# EAGLE board Crystal Cmoy Sch EaglePCB 3 (EAGLE 7.5.0)
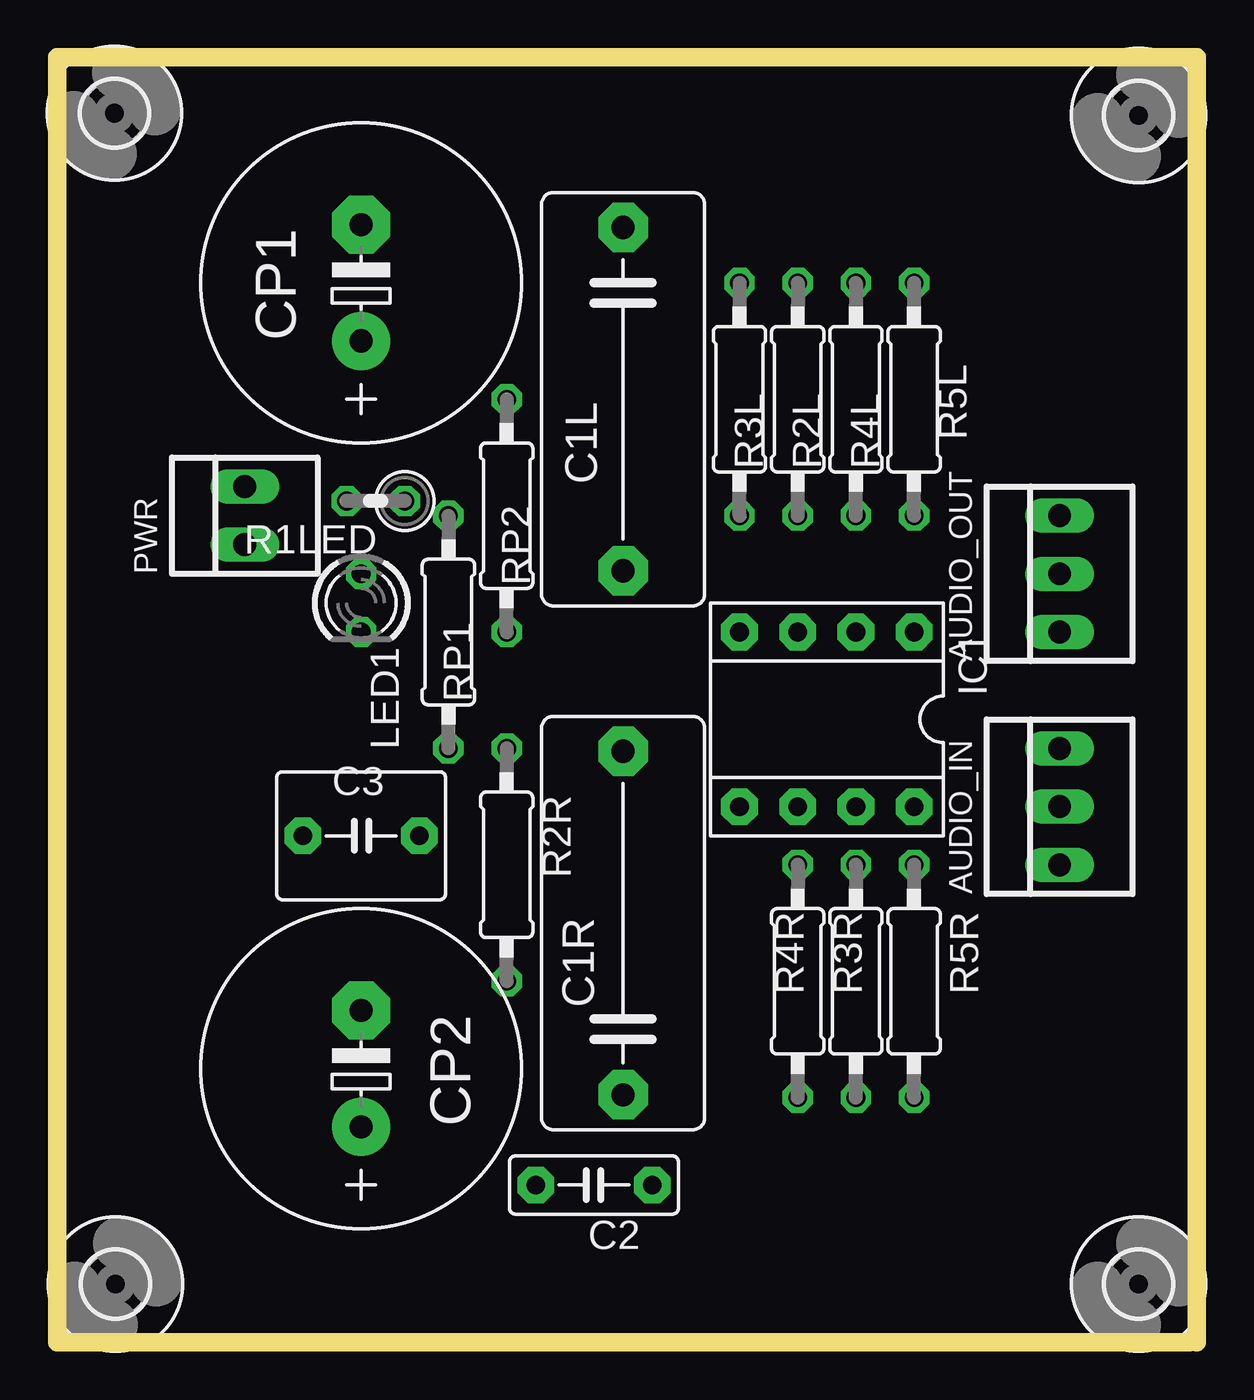
[diagram p0: board, top side]
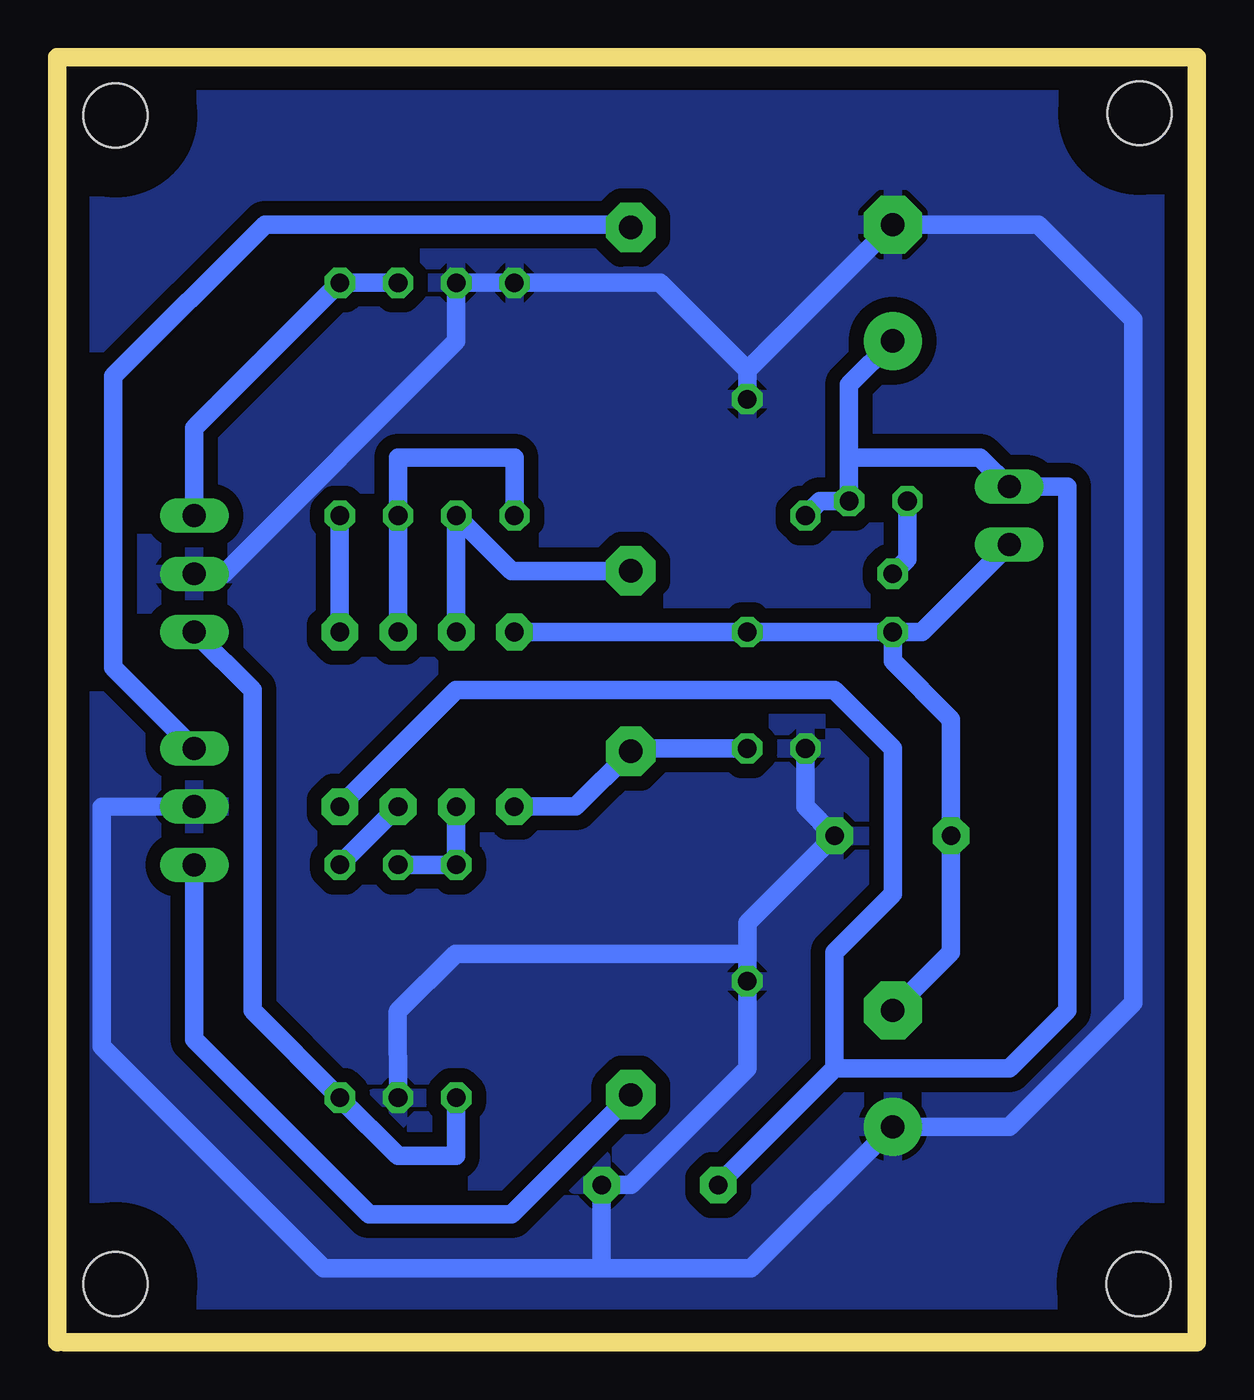
[diagram p1: board, bottom side, seen from below]

Size 49.72 x 56.07 mm. Coordinates in mm from the lower left corner, seen from the top.
Outline: 49.39,0 0,0 0,56.07 49.72,56.07 49.72,0
Copper layers (1*16): Top 0.035mm / dielectric 1.5mm / Bottom 0.035mm
Design rules "default *": minimum track width 10mil, minimum drill 24mil, track to track 8mil, track to pad 60mil, pad to pad 8mil, via to via 8mil, smd to smd 8mil, copper to edge 40mil, drill to drill 8mil, minimum pad ring 10mil, minimum via ring 8mil, stop-mask expansion 4mil, vias tented up to drill 0mil, thermal gap 10mil
Net classes: 0 default: width 1.397 mm, clearance 0.635 mm

## Footprints (pad centres in the part's own frame; a part is rotated, then mirrored left to right if it is on the bottom)
22-23-2031 = drill 1 long: 1 -2.54,0; 2 0,0; 3 2.54,0
C15B7 = drill 1.016 pad 2.159 octagon: 1 -7.493,0; 2 7.493,0
C5B2.5 = drill 0.813 pad 1.6 octagon: 1 -2.54,0; 2 2.54,0
C5B5.5 = drill 0.813 pad 1.6 octagon: 1 -2.54,0; 2 2.54,0
E5-13 = drill 1.016 pad 2.54: + -2.54,0 | drill 1.016 pad 2.54 octagon: - 2.54,0
DIL08 = drill 0.813 pad 1.6 octagon: 1 -3.81,-3.81; 2 -1.27,-3.81; 3 1.27,-3.81; 4 3.81,-3.81; 5 3.81,3.81; 6 1.27,3.81; 7 -1.27,3.81; 8 -3.81,3.81
LED3MM = drill 0.813 octagon: A -1.27,0; K 1.27,0
22-23-2021 = drill 1 long: 1 -1.27,0; 2 1.27,0
0207/2V = drill 0.813 octagon: 1 -1.27,0; 2 1.27,0
0207/10 = drill 0.813 octagon: 1 -5.08,0; 2 5.08,0
2,8 = hole 2.8: 0,0

## Placement (x,y rotation side)
AUDIO_IN  22-23-2031  [22-23-2031]  43.74,23.37 90 top
AUDIO_OUT  22-23-2031  [22-23-2031]  43.74,33.53 90 top
C1L  0.68uF  [C15B7]  24.69,41.15 270 top
C1R  0.68uf  [C15B7]  24.69,18.29 90 top
C2  0.1uF  [C5B2.5]  23.42,6.86 180 top
C3  0.1uF  [C5B5.5]  13.26,22.1 0 top
CP1  470uf  [E5-13]  13.26,46.23 90 top
CP2  470uf  [E5-13]  13.26,11.94 90 top
IC1  OPA2107AP  [DIL08]  33.58,27.18 180 top
LED1  Blue  [LED3MM]  13.26,32.26 270 top
PWR  22-23-2021  [22-23-2021]  8.18,36.07 90 top
R1LED  10K  [0207/2V]  13.89,36.7 180 top
R2L  100K  [0207/10]  32.31,41.15 90 top
R2R  100K  [0207/10]  19.61,20.83 270 top
R3L  1K  [0207/10]  29.77,41.15 90 top
R3R  1K  [0207/10]  34.85,15.75 270 top
R4L  10K  [0207/10]  34.85,41.15 90 top
R4R  10K  [0207/10]  32.31,15.75 270 top
R5L  optional  [0207/10]  37.39,41.15 90 top
R5R  optional  [0207/10]  37.39,15.75 270 top
RP1  4.7k  [0207/10]  17.07,30.99 90 top
RP2  4.7k  [0207/10]  19.61,36.07 90 top
U$1  [2,8]  47.18,53.53 0 top
U$2  [2,8]  2.49,53.63 0 top
U$3  [2,8]  2.54,2.54 0 top
U$4  [2,8]  47.18,2.54 0 top

## Library data of the parts
AUDIO_IN AUDIO_OUT PWR = con-molex
C1L C1R C2 C3 = capacitor-wima
CP1 CP2 R2L R2R R3L R3R R4L R4R R5L R5R = rcl
IC1 = burr-brown
LED1 = led
R1LED RP1 RP2 = resistor
U$1-U$4 = holes

## Nets
GND: AUDIO_IN.2 AUDIO_OUT.2 C2.1 C3.2 CP1.- CP2.+ R2L.2 R2R.2 R3L.2 R3R.2 RP1.1 RP2.2
L-IN: AUDIO_IN.3 C1L.1
L-OUT: AUDIO_OUT.3 R4L.2 R5L.2
N$1: IC1.1 R5L.1
N$3: IC1.2 R3L.1 R4L.1
N$4: C1L.2 IC1.3 R2L.1
N$5: IC1.7 R5R.1
N$7: IC1.6 R3R.1 R4R.1
N$8: C1R.2 IC1.5 R2R.1
N$14: LED1.A R1LED.2
R-IN: AUDIO_IN.1 C1R.1
R-OUT: AUDIO_OUT.1 R4R.2 R5R.2
V+: C2.2 CP1.+ IC1.8 PWR.2 R1LED.1 RP1.2
V-: C3.1 CP2.- IC1.4 LED1.K PWR.1 RP2.1

## Tracks (layer width: path | path; a pad name or v marks a point on that pad's centre or on a via)
GND
  Bottom 0.813: RP1.1 17.07,23.37 C3.2 19.61,18.29 R2R.2 19.61,11.94 24.69,6.86 C2.1 25.96,3.22 | AUDIO_OUT.2 42.47,33.53 32.31,43.69 R2L.2 R3L.2 23.42,46.23 19.61,42.42 | RP2.2 19.61,42.42 | 19.61,42.42 CP1.- 6.91,48.77 2.77,44.63 2.77,14.81 8.18,9.4 CP2.+ 19.44,3.22 25.96,3.22 | R3R.2 34.87,14.4 | AUDIO_IN.2 45.01,23.37 47.78,23.35 47.78,12.91 38.09,3.22 25.96,3.22 | 34.85,14.45 32.35,16.95 19.65,16.95
  pour Bottom: 0,0 49.72,0 49.72,56.07 0,56.07
L-IN
  Bottom 0.813: C1L.1 24.56,48.64 24.69,48.77 40.66,48.77 47.28,42.15 47.28,29.45 AUDIO_IN.3
L-OUT
  Bottom 0.813: R4L.2 R5L.2 43.74,39.88 AUDIO_OUT.3
N$1
  Bottom 0.813: R5L.1 IC1.1
N$3
  Bottom 0.813: IC1.2 R4L.1 34.85,38.61 29.77,38.61 R3L.1
N$4
  Bottom 0.813: C1L.2 29.9,33.66 R2L.1 IC1.3
N$5
  Bottom 0.813: R5R.1 IC1.7
N$7
  Bottom 0.813: IC1.6 R4R.1 R3R.1
N$8
  Bottom 0.813: IC1.5 27.1,23.37 C1R.2 24.56,25.91 R2R.1
N$14
  Bottom 0.813: R1LED.2 12.62,34.16 LED1.A
R-IN
  Bottom 0.813: AUDIO_IN.1 43.74,13.21 36.12,5.59 29.9,5.59 C1R.1
R-OUT
  Bottom 0.813: R4R.2 32.31,8.13 34.85,8.13 R5R.2 41.2,14.48 41.2,28.45 AUDIO_OUT.1
V+
  Bottom 0.813: IC1.8 32.31,28.45 15.8,28.45 13.26,25.91 13.26,19.56 15.8,17.02 15.8,11.94 | C2.2 15.8,11.94 | RP1.2 16.43,36.7 R1LED.1 15.16,38.61 | 15.16,38.61 15.16,41.78 CP1.+ | 15.16,38.61 9.45,38.61 PWR.2 5.64,37.34 5.64,14.48 8.18,11.94 15.8,11.94
V-
  Bottom 0.813: IC1.4 RP2.1 LED1.K | CP2.- 10.72,17.02 C3.1 10.72,27.18 13.26,29.72 LED1.K | PWR.1 11.99,30.99 LED1.K